# Altium PCB 4501-WB_AV_BMS.PcbDoc (part 1 of 2)
Units mm, origin at the board's own origin, x right, y up, seen from the top; angles counter-clockwise.
Board outline 95.46 x 71.36 mm, 2 copper layers (Top Layer, Bottom Layer), stack 1.671 mm thick; 104 components, 89 nets, 330 pads, 251 vias.
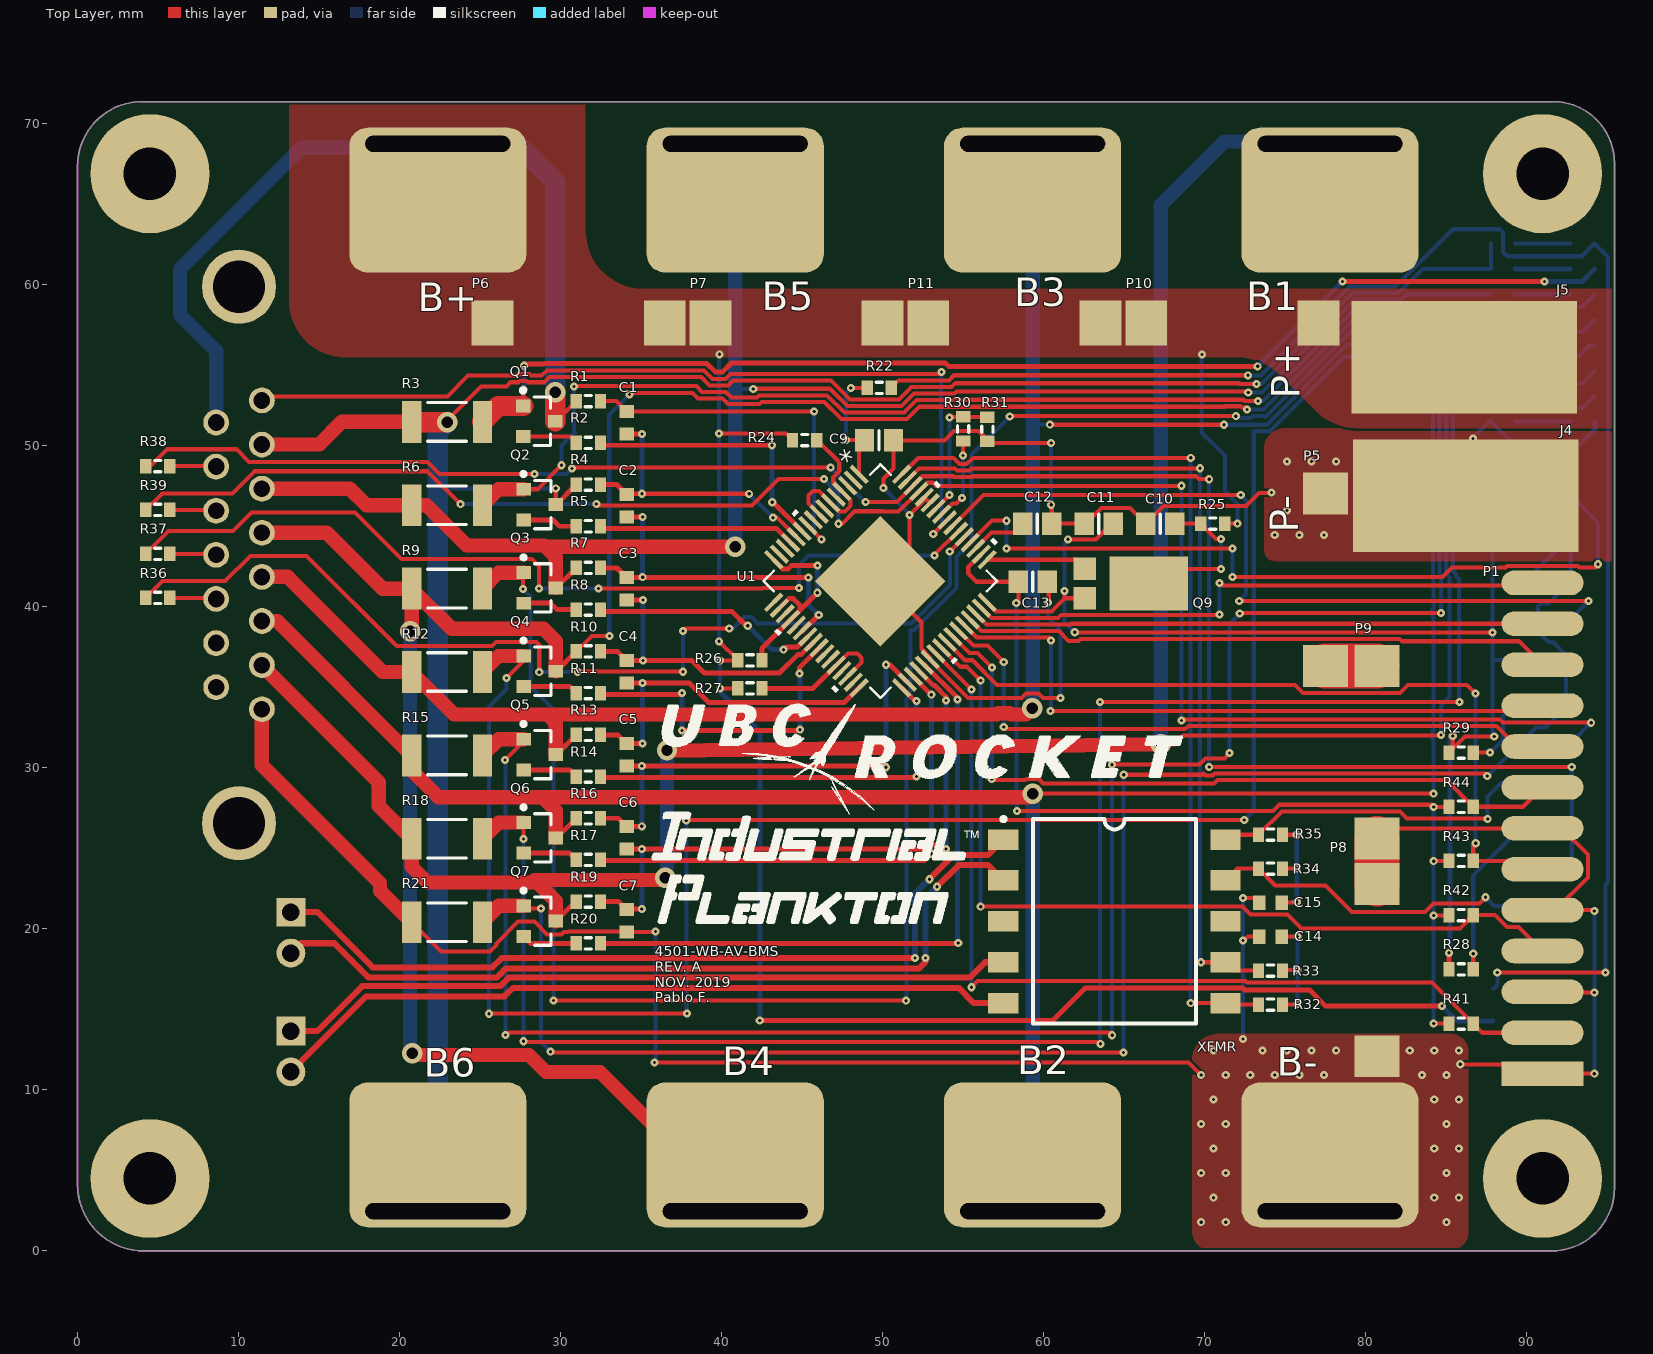
[diagram p0: Top Layer view]
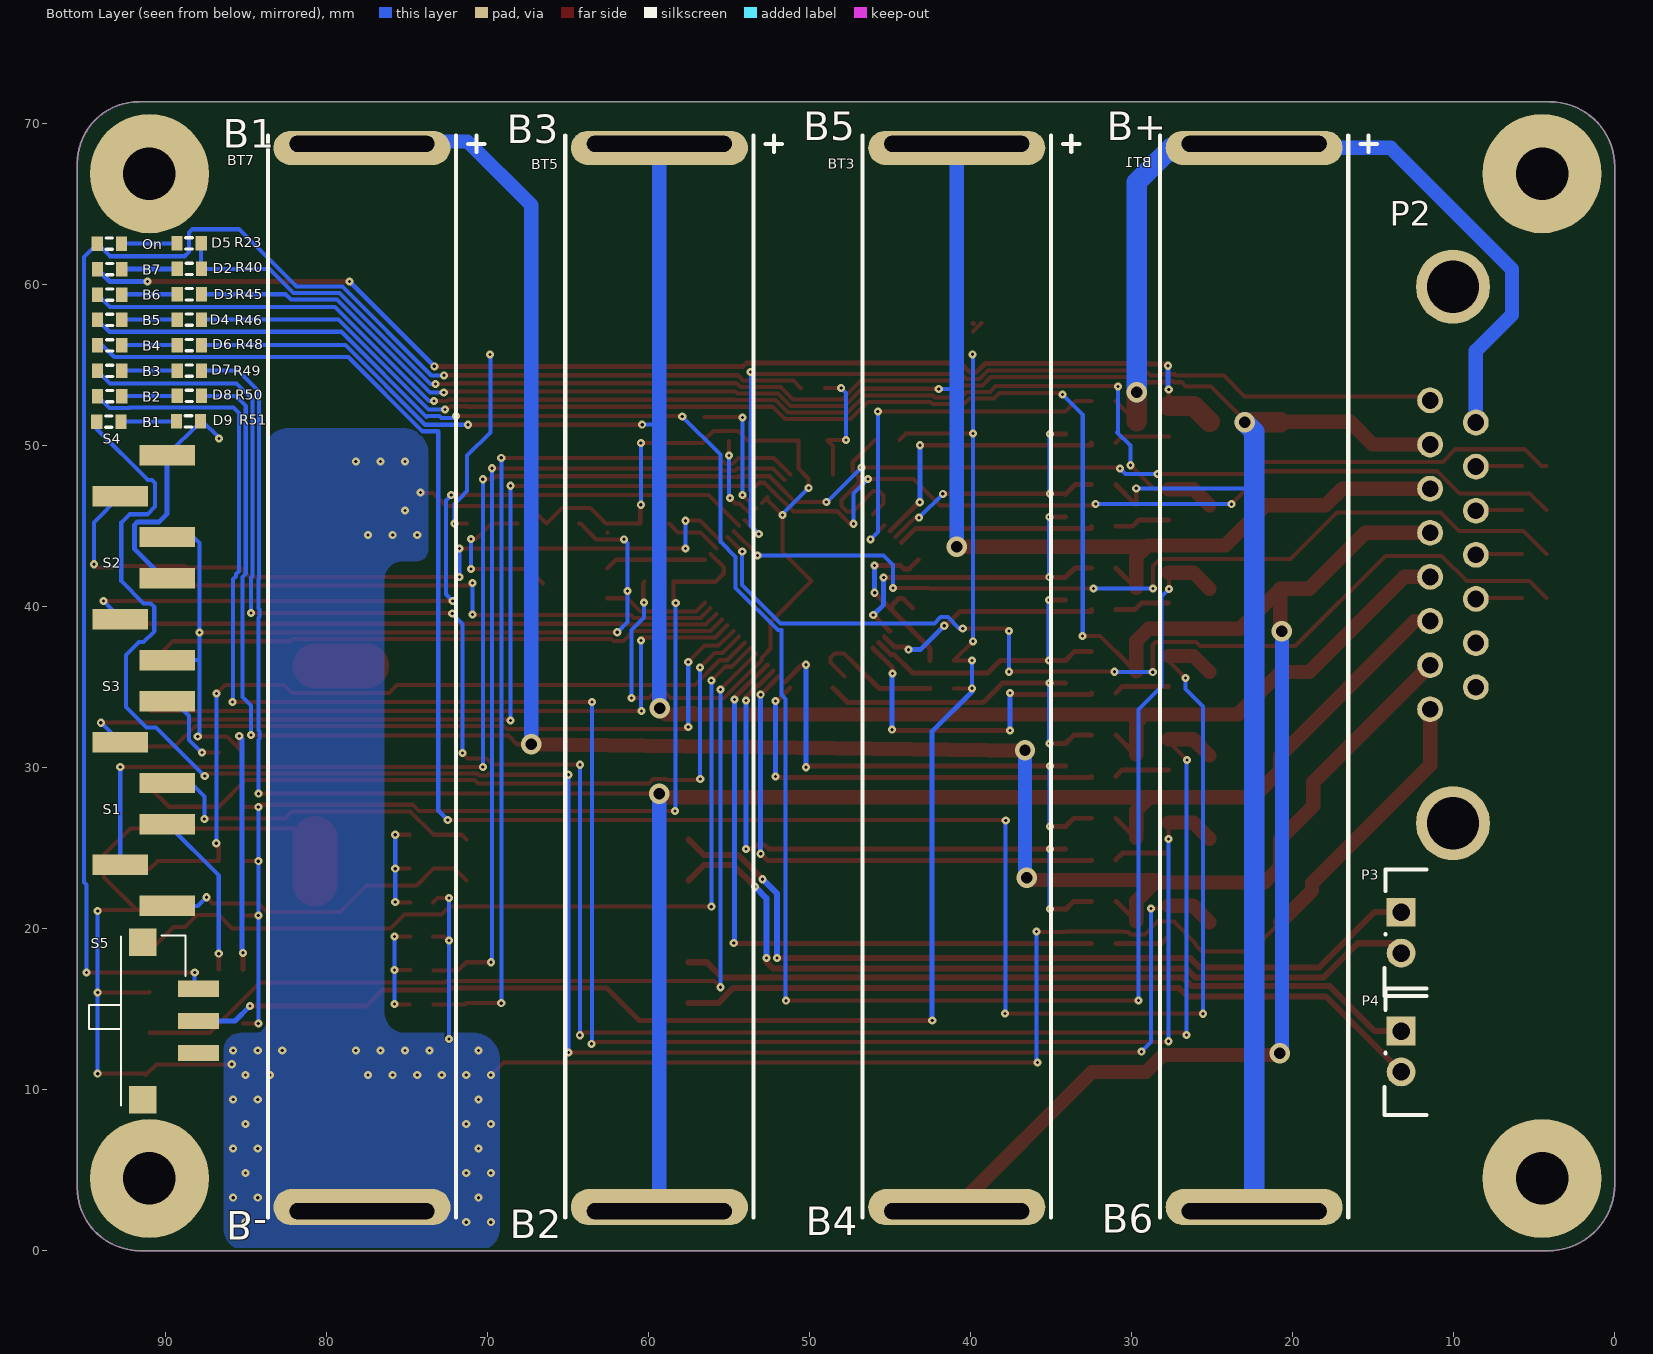
[diagram p1: Bottom Layer view, seen from below]

## Layer stack, top to bottom
Top Solder: solder mask 0.0102, Solder Resist, Dk 3.5
Top Layer: signal copper 0.0356
Dielectric 1: dielectric 1.6, FR-4, Dk 4.8
Bottom Layer: signal copper 0.0356
Bottom Solder: solder mask 0.0102, Solder Resist, Dk 3.5

## Board outline
4.115,0 91.567,0 ccw(c91.567,3.899) 95.466,3.899 95.466,67.554 ccw(c91.656,67.554) 91.656,71.364 4.011,71.364 ccw(c4.011,67.355) 0.001,67.355 0.001,4.113 ccw(c4.115,4.113)

## Design rules (kind name [scope] priority, off if disabled: settings)
Clearance [All] p1: gap=0.152 ignorepadtopadclearanceinfootprint=FALSE except(0: Arc-Hole Track-Hole SMDPad-Hole THPad-Hole Via-Hole Fill-Hole Poly-Hole Region-Hole Text-Hole)
ComponentClearance [All] p1: gap=0 collisioncheckmode=3 verticalgap=0.003 showdistances=FALSE
DiffPairsRouting [All] p1: maxlimit=0.254 minlimit=0.254 mostfreqgap=0.254 toplayer_minwidth=0.381 toplayer_maxwidth=0.381 toplayer_prefwidth=0.381 bottomlayer_minwidth=0.381 bottomlayer_maxwidth=0.381 bottomlayer_prefwidth=0.381 maxuncoupledlength=12.7
HoleSize [All] p1: absolutevalues=TRUE maxlimit=25.4 minlimit=0.025 maxpercent=80.000 minpercent=20.000
MinimumSolderMaskSliver [All] p1: minsoldermaskwidth=0.025
PolygonConnect [All] p1: connectstyle=Direct reliefconductorwidth=0.254 reliefentries=4 polygonreliefangle="90 Angle" airgapwidth=0.254
RoomDefinition BMS [InComponentClass('BMS')] p1: confinementstyle=ConfineIn formatcopy=TRUE lockcomponents=FALSE outline -5.828,1.356 96.572,1.356 96.572,69.854 -5.828,69.854
RoutingVias [All] p1: holewidth=0.2 width=0.505 viastyle="Through Hole" minholewidth=0.2 minwidth=0.505 maxholewidth=0.711 maxwidth=1.27
SilkToSilkClearance [All] p1: silktosilkclearance=0.025
SilkToSolderMaskClearance [IsPad] p1: minsilkscreentomaskgap=0.025 clearancetoexposedcopper=TRUE
SolderMaskExpansion [All] p1: expansion=0.102
Width [All] p1: maxlimit=5.08 minlimit=0.254 preferedwidth=0.305
24 further rules are at their usual default settings.

## Classes and differential pairs
differential pair IB: +IB_P -IB_N
differential pair IA: +IA_P -IA_N

## Components (designator, comment, footprint, x,y, rotation, side; value= is the part's Value field where it differs from the comment)
BT1 "Battery" PCBComponent_1#1 22.384,2.458 r90 bottom locked
BT3 "Battery" PCBComponent_1#1 40.855,2.458 r90 bottom locked
BT5 "Battery" PCBComponent_1#1 59.326,2.458 r90 bottom locked
BT7 "Battery" PCBComponent_1#1 77.796,2.458 r90 bottom locked
C1 "Cap Semi" 1608[0603] 34.102,51.432 r90 top value=10nF
C2 "Cap Semi" 1608[0603] 34.102,46.276 r90 top value=10nF
C3 "Cap Semi" 1608[0603] 34.102,41.12 r90 top value=10nF
C4 "Cap Semi" 1608[0603] 34.102,35.964 r90 top value=10nF
C5 "Cap Semi" 1608[0603] 34.102,30.808 r90 top value=10nF
C6 "Cap Semi" 1608[0603] 34.102,25.651 r90 top value=10nF
C7 "Cap Semi" 1608[0603] 34.102,20.495 r90 top value=10nF
C9 "Cap Semi" 6-0805_N 49.787,50.33 r180 top value=100nF
C10 "Cap Semi" 6-0805_N 67.244,45.161 r0 top value=100nF
C11 "Cap Semi" 6-0805_N 63.428,45.161 r0 top value=1uF
C12 "Cap Semi" 6-0805_N 59.611,45.161 r180 top value=1uF
C13 "Cap Semi" 6-0805_N 59.337,41.552 r180 top value=1uF
C14 "Cap Semi" 1608[0603] 74.096,19.514 r0 top value=10nF
C15 "Cap Semi" 1608[0603] 74.096,21.623 r0 top value=10nF
D2 "LED0" J1-0603 93.464,60.969 r180 bottom
D3 "LED0" J1-0603 93.464,59.39 r180 bottom
D4 "LED0" J1-0603 93.464,57.811 r180 bottom
D5 "LED0" J1-0603 93.482,62.547 r180 bottom
D6 "LED0" J1-0603 93.464,56.232 r180 bottom
D7 "LED0" J1-0603 93.464,54.654 r180 bottom
D8 "LED0" J1-0603 93.464,53.075 r180 bottom
D9 "LED0" J1-0603 93.518,51.496 r180 bottom
J4 "Socket" PCBComponent_1#2 86.213,46.886 r180 top
J5 "Socket" PCBComponent_1#2 86.119,55.499 r180 top
P1 "Header 13" PCBComponent_1#3 90.989,11 r90 top
P2 "5747845-4" *5747845-4 10.036,26.563 r270 bottom
P3 "Header 2" WM4900-ND 14.779,13.259 r180 bottom locked
P4 "Header 2" WM4900-ND 14.779,5.875 r180 bottom locked
P5 "Header 2" PCBComponent_1#4 77.526,36.33 r90 top
P6 "Header 2" PCBComponent_1#4 36.477,57.625 r180 top
P7 "Header 2" PCBComponent_1#4 50.011,57.625 r180 top
P8 "Header 2" PCBComponent_1#4 80.711,12.079 r90 top
P9 "Header 2" PCBComponent_1#4 80.714,25.617 r90 top
P10 "Header 2" PCBComponent_1#4 77.08,57.625 r180 top
P11 "Header 2" PCBComponent_1#4 63.546,57.625 r180 top
Q1 "MOSFET-P" SOT95P245X110-3N 28.677,51.519 r0 top
Q2 "MOSFET-P" SOT95P245X110-3N 28.705,46.344 r0 top
Q3 "MOSFET-P" SOT95P245X110-3N 28.705,41.17 r0 top
Q4 "MOSFET-P" SOT95P245X110-3N 28.705,35.996 r0 top
Q5 "MOSFET-P" SOT95P245X110-3N 28.705,30.821 r0 top
Q6 "MOSFET-P" SOT95P245X110-3N 28.705,25.647 r0 top
Q7 "MOSFET-P" SOT95P245X110-3N 28.705,20.472 r0 top
Q9 "DXT5551P5-13" DXT5551P5-13 66.543,41.448 r270 top
R1 "Res3" J1-0603 31.732,52.77 r0 top value=100
R2 "Res3" J1-0603 31.732,50.18 r0 top value=3.3k
R3 "Res3" 12Z-2010 22.955,51.482 r180 top value=33
R4 "Res3" J1-0603 31.732,47.589 r0 top value=100
R5 "Res3" J1-0603 31.732,44.999 r0 top value=3.3k
R6 "Res3" 12Z-2010 22.955,46.303 r180 top value=33
R7 "Res3" J1-0603 31.732,42.408 r0 top value=100
R8 "Res3" J1-0603 31.732,39.818 r0 top value=3.3k
R9 "Res3" 12Z-2010 22.955,41.124 r180 top value=33
R10 "Res3" J1-0603 31.732,37.227 r0 top value=100
R11 "Res3" J1-0603 31.732,34.637 r0 top value=3.3k
R12 "Res3" 12Z-2010 22.955,35.945 r180 top value=33
R13 "Res3" J1-0603 31.732,32.046 r0 top value=100
R14 "Res3" J1-0603 31.732,29.456 r0 top value=3.3k
R15 "Res3" 12Z-2010 22.955,30.766 r180 top value=33
R16 "Res3" J1-0603 31.732,26.865 r0 top value=100
R17 "Res3" J1-0603 31.732,24.275 r0 top value=3.3k
R18 "Res3" 12Z-2010 22.955,25.587 r180 top value=33
R19 "Res3" J1-0603 31.732,21.684 r0 top value=100
R20 "Res3" J1-0603 31.732,19.094 r0 top value=3.3k
R21 "Res3" 12Z-2010 22.955,20.408 r180 top value=33
R22 "1%" J1-0603 49.797,53.597 r0 top value=100
R23 "Res3" J1-0603 88.534,62.565 r180 bottom value=475
R24 "1%" J1-0603 45.164,50.35 r0 top value=100
R25 "1%" J1-0603 70.511,45.161 r0 top value=100
R26 "1%" J1-0603 41.767,36.665 r0 top value=100
R27 "1%" J1-0603 41.767,34.933 r0 top value=100
R28 "Res3" J1-0603 85.938,17.481 r180 top value=1M
R29 "Res3" J1-0603 85.938,30.945 r180 top value=1M
R30 "Res3" J1-0603 55.009,51.044 r90 top value=1k
R31 "Res3" J1-0603 56.511,51.023 r270 top value=1k
R32 "Res3" J1-0603 74.096,15.295 r0 top value=50
R33 "Res3" J1-0603 74.096,17.404 r180 top value=50
R34 "Res3" J1-0603 74.096,23.732 r0 top value=50
R35 "Res3" J1-0603 74.096,25.841 r180 top value=50
R36 "Res3" J1-0603 4.989,40.551 r180 top value=100
R37 "Res3" J1-0603 4.989,43.281 r180 top value=100
R38 "Res3" J1-0603 4.989,48.74 r0 top value=100
R39 "Res3" J1-0603 4.989,46.01 r0 top value=100
R40 "Res3" J1-0603 88.516,60.986 r0 bottom value=475
R41 "Res3" J1-0603 85.938,14.115 r0 top value=10k
R42 "Res3" J1-0603 85.938,20.847 r0 top value=10k
R43 "Res3" J1-0603 85.938,24.213 r0 top value=10k
R44 "Res3" J1-0603 85.938,27.579 r0 top value=10k
R45 "Res3" J1-0603 88.516,59.408 r0 bottom value=475
R46 "Res3" J1-0603 88.516,57.829 r0 bottom value=475
R48 "Res3" J1-0603 88.516,56.25 r0 bottom value=475
R49 "Res3" J1-0603 88.516,54.671 r0 bottom value=475
R50 "Res3" J1-0603 88.516,53.093 r0 bottom value=475
R51 "Res3" J1-0603 88.57,51.514 r0 bottom value=475
S1 "SW-SPDT" *TSM-103-01-L-SV 91.348,23.965 r270 bottom
S2 "SW-SPDT" *TSM-103-01-L-SV 91.352,39.23 r270 bottom
S3 "SW-SPDT" *TSM-103-01-L-SV 91.348,31.593 r270 bottom
S4 "SW-SPDT" *TSM-103-01-L-SV 91.352,46.871 r270 bottom
S5 "SS312SAH4-R" *SW_SS312SAH4-R 89.46,14.273 r180 bottom
U1 "LTC6812HLWE-1" "LQFP64_LWE_A - duplicate" 49.868,41.592 r315 top value=Value
XFMR "HM2100NLT" HM2100NLT 57.513,25.54 r0 top

## Footprints (in the part's own frame and the unit in brackets; to place one, negate y for a bottom-side part, rotate by r counter-clockwise, add the part's x,y. Pads: shape width x height; smd on the part's side, far side on the other; paste and mask are expansions set on the pad)
6-0805_N [mm] "Chip Resistor, Body 2.0x1.2mm, IPC Medium Density"
  rect 1.2x1.4 smd: 1(-0.9,0) 2(0.9,0)
  silkscreen extent 0,-0.6 0,0.6, body extent -1.07,-0.7 1.07,0.7, height 0.7
12Z-2010 [mm] "Chip Resistor, Body 5.0x2.5mm, IPC High Density"
  rect 1.2x2.6 smd: 1(-2.2,0) 2(2.2,0)
  silkscreen extent -1.2,-1.2 1.2,1.2, body extent -2.58,-1.33 2.58,1.33, height 0.9
1608[0603] [mm] "Chip Capacitor, Body 1.6x0.8mm, IPC High Density"
  rect 0.8x0.9 smd: 1(-0.7,0) 2(0.7,0)
  body extent -0.87,-0.48 0.87,0.48, height 1.3
*5747845-4 [mm]
  round 1.6 hole 1.04: 1(-26.25,-1.42) 2(-23.51,-1.42) 3(-20.77,-1.42) 4(-18.03,-1.42) 5(-15.29,-1.42) 6(-12.55,-1.42) 7(-9.81,-1.42) 8(-7.07,-1.42) 9(-24.88,1.42) 10(-22.14,1.42) 11(-19.4,1.42) 12(-16.66,1.42) 13(-13.92,1.42) 14(-11.18,1.42) 15(-8.44,1.42)
  round 4.6 hole 3.25: 16(0,0) 17(-33.32,0)
  body extent -36.3,-3.03 3.07,15.86, height 12.62
*SW_SS312SAH4-R [mm]
  rect 2.55x1 smd: 1(1.525,-2) 2(1.525,0) 3(1.525,2)
  rect 1.7x1.7 smd: P$1(-1.95,-4.9) P$2(-1.95,4.9)
  silkscreen extent -5.3,-5.25 0.7,5.3, body extent -5.27,-5.25 2.12,5.25, height 3.1
*TSM-103-01-L-SV [mm]
  rect 1.27x3.43 smd: 1(-2.54,1.46) 2(0,-1.46) 3(2.54,1.46)
  body extent -3.94,-2.64 3.68,2.64, height 9.78
DXT5551P5-13 [mm]
  rect 1.4x1.39 smd: 1(0.92,-3.982) 2(-0.92,-3.982)
  rect 3.36x4.86 smd: 3(0,0)
HM2100NLT [mm]
  rect 1.89x1.27 smd: 1(0,0) 2(0,-2.54) 3(0,-5.08) 4(0,-7.62) 5(0,-10.16) 6(13.79,-10.16) 7(13.79,-7.62) 8(13.79,-5.08) 9(13.79,-2.54) 10(13.79,0)
  silkscreen extent -0.13,-11.43 11.96,1.4, body extent -0.5,-12.3 14.47,2.4, height 3.3
J1-0603 [mm] "Chip Resistor, Body 1.6x0.8mm, IPC High Density"
  rect 0.7x0.9 smd: 1(-0.75,0) 2(0.75,0)
  silkscreen extent -0.2,-0.35 0.2,0.35, body extent -0.85,-0.48 0.85,0.48, height 0.9
"LQFP64_LWE_A - duplicate" [mm]
  rect 1.461x0.27 smd paste+0 mask+0: 1(-5.625,3.75) 2(-5.625,3.25) 3(-5.625,2.75) 4(-5.625,2.25) 5(-5.625,1.75) 6(-5.625,1.25) 7(-5.625,0.75) 8(-5.625,0.25) 9(-5.625,-0.25) 10(-5.625,-0.75) 11(-5.625,-1.25) 12(-5.625,-1.75) 13(-5.625,-2.25) 14(-5.625,-2.75) 15(-5.625,-3.25) 16(-5.625,-3.75) 33(5.625,-3.75) 34(5.625,-3.25) 35(5.625,-2.75) 36(5.625,-2.25) 37(5.625,-1.75) 38(5.625,-1.25) 39(5.625,-0.75) 40(5.625,-0.25) 41(5.625,0.25) 42(5.625,0.75) 43(5.625,1.25) 44(5.625,1.75) 45(5.625,2.25) 46(5.625,2.75) 47(5.625,3.25) 48(5.625,3.75)
  rect 0.27x1.461 smd paste+0 mask+0: 17(-3.75,-5.625) 18(-3.25,-5.625) 19(-2.75,-5.625) 20(-2.25,-5.625) 21(-1.75,-5.625) 22(-1.25,-5.625) 23(-0.75,-5.625) 24(-0.25,-5.625) 25(0.25,-5.625) 26(0.75,-5.625) 27(1.25,-5.625) 28(1.75,-5.625) 29(2.25,-5.625) 30(2.75,-5.625) 31(3.25,-5.625) 32(3.75,-5.625) 49(3.75,5.625) 50(3.25,5.625) 51(2.75,5.625) 52(2.25,5.625) 53(1.75,5.625) 54(1.25,5.625) 55(0.75,5.625) 56(0.25,5.625) 57(-0.25,5.625) 58(-0.75,5.625) 59(-1.25,5.625) 60(-1.75,5.625) 61(-2.25,5.625) 62(-2.75,5.625) 63(-3.25,5.625) 64(-3.75,5.625)
  rect 5.74x5.74 smd paste-2.857 mask+0: 65(0,0)
  silkscreen extent -6.86,-6.86 6.86,6.86, body extent 0,0 0.25,0.25, height 0.25
PCBComponent_1#1 [mm]
  rrect100% 2.125x11 / inner rrect25% 0x0 / far side rrect0% 0x0 all layers, no hole: 1(66.04,0)
  rrect0% 0x0 / inner rrect0% 0x0 / far side rrect25% 9x11 hole 9 slot 1 at 0 deg copper offset -3.5,0: 1(66.294,0)
  rrect25% 0x0 / inner rrect25% 0x0 / far side rrect25% 9x11 hole 9 slot 1 at 0 deg copper offset 3.5,0: 2(0,0)
  rrect100% 2.25x11 / inner rrect25% 0x0 / far side rrect0% 0x0 all layers, no hole: 2(0.254,0)
  silkscreen extent -0.38,-7.62 66.8,5.84, body extent 0.63,-9.2 65.63,9.2, height 18.6
PCBComponent_1#2 [mm]
  rect 14x7 smd: 1(0,0)
PCBComponent_1#3 [mm]
  rect 1.524x5.08 smd: 1(0,0)
  oval 1.524x5.08 smd: 2(2.54,0) 3(5.08,0) 4(7.62,0) 5(10.16,0) 6(12.7,0) 7(15.24,0) 8(17.78,0) 9(20.32,0) 10(22.86,0) 11(25.4,0) 12(27.94,0) 13(30.48,0)
PCBComponent_1#4 [mm]
  rect 2.6x2.8 smd: 1(0,0) 2(10.7,0)
  body extent -0.94,-1.15 11.36,1.15, height 1.8
SOT95P245X110-3N [mm] "SOT23, 3-Leads, Body 2.90x2.45mm, Pitch 0.95mm, IPC Medium Density"
  rect 0.9x0.8 smd: 1(-1,0.95) 2(-1,-0.95) 3(1,0)
  silkscreen extent -1.12,-1.5 0.7,2.02, body extent -0.7,-1.5 0.7,1.5, height 1.1
WM4900-ND [mm]
  rect 1.79x1.79 hole 1.09: 1(1.524,7.772)
  round 1.79 hole 1.09: 2(1.524,5.232)
  silkscreen extent 0.48,2.57 3.1,10.42, body extent 0.89,2.84 14.48,10.21, height 7.11

## Part data
BT1 BT3 BT5 BT7: "Multicell Battery", LatestRevisionDate=17-Jul-2002, LatestRevisionNote="Re-released for DXP Platform.", PackageDescription="Battery; 2 Leads", PackageReference=BAT-2, Published=24-Mar-1999, Publisher="Altium Limited"
C1 C2 C3 C4 C5 C6 C7 C9 C10 C11 C12 C13 C14 C15: "Capacitor (Semiconductor SIM Model)", LatestRevisionDate=29-May-2009, LatestRevisionNote="IPC-7351 Footprint Added.", PackageDescription="Chip Capacitor", PackageReference=C1206, Published=8-Jun-2000, Publisher="Altium Limited"
  C1 C2 C3 C4 C5 C6 C7 C14 C15: SPN=399-1092-1-ND
  C9 C10: SPN=1276-1090-1-ND
  C11 C12 C13: SPN=311-3498-1-ND
D2 D3 D4 D5 D6 D7 D8 D9: "Typical INFRARED GaAs LED", LatestRevisionDate=08-Jul-2005, LatestRevisionNote="Mech Layer 1 removed.", PackageDescription="LED; 2 Leads", PackageReference=LED-0, Published=8-Jun-2000, Publisher="Altium Limited"
  D2 D3 D4 D6 D7 D8 D9: SPN=160-1435-1-ND
  D5: SPN=160-1646-1-ND
P1: "Header, 13-Pin", LatestRevisionDate=17-Jul-2002, LatestRevisionNote="Re-released for DXP Platform.", Publisher="Altium Limited"
P2: library part "Header 7X2A", "Header, 7-Pin, Dual row", LatestRevisionDate=17-Jul-2002, LatestRevisionNote="Re-released for DXP Platform.", Publisher="Altium Limited"
P3 P4 P5 P6 P7 P8 P9 P10 P11: "Header, 2-Pin", LatestRevisionDate=17-Jul-2002, LatestRevisionNote="Re-released for DXP Platform.", Publisher="Altium Limited"
  P5 P6 P7 P8 P9 P10 P11: SPN=36-5104-ND
Q1 Q2 Q3 Q4 Q5 Q6 Q7: "P-Channel MOSFET", LatestRevisionDate=17-Jul-2002, LatestRevisionNote="Re-released for DXP Platform.", PackageDescription="TO, Flat Index; 3 In-Line, Axial Leads; Body Dia. 4.6mm; Lead Dia. 0.5 mm (max)", PackageReference=E3, PackageVersion=1995/1996, Published=8-Jun-2000, Publisher="Altium Limited", SPN=BSS308PEH6327XTSA1CT-ND
Q9: library part 2N3904, "NPN General Purpose Amplifier", ComponentLink1Description="Manufacturer Link", ComponentLink1URL=http://www.fairchildsemi.com/, ComponentLink2Description=Datasheet, ComponentLink2URL=http://www.fairchildsemi.com/ds/2N%2F2N3904.pdf, DatasheetVersion=1997, LatestRevisionDate=15-Jan-2003, LatestRevisionNote="PCB Footprint 'BCY-W3/D4.7' replaced", PackageDescription="TO, Flat Index; 3 In-Line, Axial Leads; Body Dia. 4.5mm; Leads 0.51 x 0.48 mm (max)", PackageReference=TO-92A, PackageVersion=Sep-1998, Published=8-Jun-2000, Publisher="Altium Limited", SPN=DXT5551P5-13CT-ND
R1 R2 R3 R4 R5 R6 R7 R8 R9 R10 R11 R12 R13 R14 R15 R16 R17 R18 R19 R20 R21 R23 R28 R29 R30 R31 R32 R33 R34 R35 R36 R37 R38 R39 R40 R41 R42 R43 R44 R45 R46 R48 R49 R50 R51: "Resistor", LatestRevisionDate=29-May-2009, LatestRevisionNote="IPC-7351 Footprint Added.", PackageDescription="Chip Resistor", PackageReference=J1-0603, Published=8-Jun-2000, Publisher="Altium Limited"
  R1 R4 R7 R10 R13 R16 R19 R36 R37 R38 R39: Parameter 1=A129676CT-ND, SPN=A129676CT-ND
  R2 R5 R8 R11 R14 R17 R20: SPN=A129543CT-ND
  R3 R6 R9 R12 R15 R18 R21: SPN=A130642CT-ND
  R23 R40 R45 R46 R48 R49 R50 R51: SPN=RMCF2010JT33R0CT-ND
  R28 R29: SPN=A129724CT-ND
  R30 R31: SPN=RNCP0603FTD1K00CT-ND
  R32 R33 R34 R35: SPN=311-2598-1-ND
R22 R24 R25 R26 R27: library part Res3, "Resistor", LatestRevisionDate=29-May-2009, LatestRevisionNote="IPC-7351 Footprint Added.", PackageDescription="Chip Resistor", PackageReference=J1-0603, Published=8-Jun-2000, Publisher="Altium Limited", SPN=A129676CT-ND
  R22 R24 R25 R27: Parameter 1=A129676CT-ND
S1 S2 S3 S4: "SPDT Subminiature Toggle Switch, Right Angle Mounting, Vertical Actuation", ComponentLink1Description="Manufacturer Link", ComponentLink1URL=http://www.apem.com, DatasheetVersion=05-Dec-2000, LatestRevisionDate=17-Dec-2003, LatestRevisionNote="Schematic revised, PCB Footprint replaced.", PackageDescription="Switch; 4 Leads", PackageReference=TL36WW15050, Published=24-Mar-1999, Publisher="Altium Limited", SPN="S9337-ND, SAM8981-ND"
S5: "Switch Slide ON None ON SPDT Side Slide 0.1A 28VAC 28VDC 0.4VA 10000Cycles Gull Wing SMD T/R", Package=None, Availability=Unavailable, MF="NKK Switches", MP=SS312SAH4-R, Price=None, SnapEDA_Link=https://www.snapeda.com/parts/SS312SAH4-R/NKK%20Switches/view-part/?ref=snap
U1: "No Description Available", Copyright="Copyright (C) 2018 Accelerated Designs. All rights reserved", RefDes=RefDes, Type=DEV
XFMR: library part "Header 5X2A", "Header, 5-Pin, Dual row", LatestRevisionDate=17-Jul-2002, LatestRevisionNote="Re-released for DXP Platform.", Publisher="Altium Limited", SPN=1840-1032-1-ND
J4 J5: LatestRevisionDate=17-Jul-2002, LatestRevisionNote="Re-released for DXP Platform.", Publisher="Altium Limited"

## Free pads (board coordinates)
  round 7.4 hole 3.251: 1(4.501,4.5) 1(4.501,66.896) 1(90.996,4.5) 1(90.996,66.896)

## Via types
v1: diameter 0.505, hole 0.2, Top Layer to Bottom Layer, tented both sides, 238 vias
v2: diameter 1.27, hole 0.711, Top Layer to Bottom Layer, tented both sides, 10 vias
v3: diameter 0.505, hole 0.2, Top Layer to Bottom Layer, 3 vias

## Nets (pads, with @x,y where several pads share a name; then routed paths per layer and width w, separated by ;. In a path a pad name is that pad's centre, name@x,y a point inside that pad or via, vN(x,y) a via of type N, cw(c..) or ccw(c..) an arc to the next point about the centre after c; other vN are vias at no path point)
C1: C6.1 C7.2 R19.2 U1.36 | length 38.4
  Top Layer w0.305: R19.2 33.613,21.684 C7.2 34.128,21.221 v1(35.053,21.221) ; C6.1 v1(35.053,24.951) 52.535,24.951 52.802,25.218 53.263,25.218 53.53,24.951 v1(53.938,24.951) ; U1.36 53.182,35.096 53.263,35.096 53.938,34.422 v1(53.938,34.175)
  Bottom Layer w0.305: v1(35.053,21.221) v1(35.053,24.951) ; v1(53.938,24.951) v1(53.938,34.175)
C2: C5.1 C6.2 R16.2 U1.34 | length 30.9
  Top Layer w0.305: R16.2 33.588,26.865 C6.2 35.044,26.351 v1(35.054,26.361) ; C5.1 v1(35.054,30.108) 50.208,30.108 50.218,30.097 v1(50.218,30.03) ; v1(50.218,36.398) 50.466,36.398 U1.34
  Bottom Layer w0.305: v1(35.054,26.361) v1(35.054,30.108) ; v1(50.218,30.03) v1(50.218,36.398)
C3: C4.1 C5.2 R13.2 U1.32 | length 21.9
  Top Layer w0.305: R13.2 33.563,32.046 C5.2 v1(35.087,31.508) ; C4.1 35.082,35.264 v1(35.087,35.259) ; v1@35.087,35.264 38.002,35.264 39.213,34.054 47.632,34.054 U1.32
  Bottom Layer w0.305: v1(35.087,31.508) v1(35.087,35.259)
C6: C3.1 C4.2 R10.2 U1.24 | length 19.4
  Top Layer w0.305: R10.2 33.539,37.227 C4.2 v1@35.127,36.664 ; C3.1 v1(35.132,40.42) ; v1@35.11,36.647 v1@35.127,36.664 ; v1(35.132,36.668) v1@35.127,36.664 ; U1.24 44.965,37.043 44.76,37.043 43.599,35.883 38.939,35.883 38.157,36.664 v1@35.127,36.664
  Bottom Layer w0.305: v1(35.132,36.668) v1(35.132,40.42)
C7: C2.1 C3.2 R7.2 U1.22 | length 22
  Top Layer w0.305: R7.2 33.514,42.408 C3.2 v1@35.122,41.82 ; C2.1 v1(35.104,45.576) ; v1(35.104,41.837) v1@35.122,41.82 ; v1@35.128,41.813 v1@35.122,41.82 ; U1.22 45.055,38.499 v1(46.04,39.484) ; v1(45.395,41.821) v1(45.395,41.821) v1@35.122,41.82
  Bottom Layer w0.305: v1(35.104,41.837) v1(35.104,45.576) ; v1(45.395,41.821) 45.395,40.129 v1(46.04,39.484)
C11: C1.1 C2.2 R4.2 U1.12 | length 18.2
  Top Layer w0.254: v1(35.057,47.015) 41.717,47.015 v1(41.719,47.013) ; v1(43.2,45.532) 43.453,45.532 U1.12
  Top Layer w0.305: R4.2 33.489,47.589 C2.2 34.141,47.015 v1(35.057,47.015) ; C1.1 35.056,50.732 v1(35.057,50.731)
  Bottom Layer w0.254: v1(41.719,47.013) v1(43.2,45.532)
  Bottom Layer w0.305: v1(35.057,47.015) v1(35.057,50.731)
C12: C1.2 R1.2 U1.10 | length 22.9
  Top Layer w0.254: R1.2 33.464,52.77 C1.2 v1(45.757,52.132) ; U1.10 45.364,45.04 v1(46.218,44.186)
  Bottom Layer w0.254: v1(45.757,52.132) 45.757,44.647 v1(46.218,44.186)
Cell1: BT7.1 P2.7 Q7.3 R18.2 R19.1 R50.1 | length 163.4
  Top Layer w0.254: v2(67.273,31.458) 68.166,31.458 68.704,31.995 84.645,31.995 v1(84.679,32.029)
  Top Layer w0.305: Q7.3 30.917,21.684 R19.1
  Top Layer w0.889: P2.7 18.722,29.107 18.722,27.62 R18.2 20.755,23.872 21.748,22.879 28.553,22.879 ; Q7.3 29.705,21.728 28.553,22.879 ; v2(36.51,23.183) 36.352,23.025 28.407,23.025 28.553,22.879 ; v2(36.617,31.074) 36.634,31.057 v2(67.273,31.458)
  Bottom Layer w0.254: v1(84.679,32.029) 84.679,33.853 85.215,34.39 85.215,41.856 85.011,42.06 85.011,52.464 85.64,53.093 R50.1
  Bottom Layer w0.889: v2(36.51,23.183) 36.617,23.289 v2(36.617,31.074) ; v2(67.273,31.458) 67.273,64.936 71.236,68.899 77.395,68.899 BT7.1@77.796,68.498
Cell2: BT5.2 P2.6 Q6.3 R15.2 R16.1 R49.1 | length 137.5
  Top Layer w0.254: v2(59.326,28.391) v1(84.22,28.391)
  Top Layer w0.305: Q6.3 29.764,25.647 R16.1
  Top Layer w0.889: P2.6 12.408,39.113 R15.2 20.755,29.841 22.431,28.166 28.877,28.166 ; Q6.3 29.705,27.339 28.877,28.166 ; v2(59.326,28.391) 59.101,28.166 28.877,28.166
  Bottom Layer w0.254: v1(84.22,28.391) 84.22,31.736 84.147,31.809 84.147,32.25 84.22,32.323 84.22,39.315 84.152,39.383 84.152,39.824 84.22,39.892 84.22,41.701 84.198,41.723 84.198,53.066 84.22,53.088 84.22,53.402 85.489,54.671 R49.1
  Bottom Layer w0.889: BT5.2@59.326,2.712 v2(59.326,28.391)
Cell3: BT5.1 P2.5 Q5.3 R12.2 R13.1 R48.1 | length 121.4
  Top Layer w0.254: v1(60.394,51.308) 60.398,51.304 v1(71.212,51.304)
  Top Layer w0.305: Q5.3 29.757,30.821 R13.1
  Top Layer w0.889: P2.5 13.059,41.853 18.967,35.945 R12.2 23.396,33.304 29.2,33.304 29.201,33.303 ; Q5.3 29.705,32.8 29.201,33.303 ; v2(59.301,33.703) 58.901,33.303 57.959,33.303 57.885,33.377 57.182,33.377 57.108,33.303 29.201,33.303
  Bottom Layer w0.254: 59.326,51.321 59.338,51.308 v1(60.394,51.308) ; v1(71.212,51.304) 73.873,51.304 78.82,56.25 R48.1
  Bottom Layer w0.889: v2(59.301,33.703) 59.326,33.727 59.326,51.321 BT5.1@59.326,68.498
Cell4: BT3.2 P2.4 Q4.3 R9.2 R10.1 R46.1 | length 152.8
  Top Layer w0.254: R10.1 31.946,38.191 v1(33.043,38.191) ; v1(34.28,53.175) 34.28,53.279 38.202,53.279 38.543,52.938 40.067,52.938 40.42,52.585 42.362,52.585 42.503,52.725 46.382,52.725 47.46,51.648 51.517,51.648 52.293,52.423 71.236,52.423 71.265,52.452 72.248,52.452 72.331,52.369 72.599,52.369 72.647,52.321 v1(72.647,52.243)
  Top Layer w0.305: Q4.3 29.75,35.996 R10.1
  Top Layer w0.889: P2.4 15.49,44.593 18.959,41.124 R9.2 ; v2(20.659,38.478) 20.755,38.575 R9.2 ; v2(20.782,12.271) 20.889,12.164 28.048,12.164 29.102,11.11 32.457,11.11 BT3.2@40.855,2.712 ; Q4.3 29.705,37.877 28.948,38.633 23.246,38.633 R9.2
  Bottom Layer w0.254: v1(33.043,38.191) 33.028,38.207 33.028,51.923 v1(34.28,53.175) ; v1(72.647,52.243) 72.647,52.242 73.662,52.242 79.249,57.829 R46.1
  Bottom Layer w0.889: v2@20.659,38.519 v2(20.659,38.478) 20.659,12.394 v2(20.782,12.271)
Cell5: BT3.1 P2.3 Q3.3 R6.2 R7.1 R45.1 | length 110.6
  Top Layer w0.254: v1(41.974,53.523) 41.958,53.538 46.748,53.538 47.825,52.461 51.181,52.461 51.956,53.236 54.459,53.236 54.595,53.371 72.656,53.371 v1(72.72,53.308)
  Top Layer w0.305: Q3.3 29.744,41.17 R7.1
  Top Layer w0.889: P2.3 16.919,47.333 17.948,46.303 R6.2 21.682,46.303 24.183,43.802 28.981,43.802 ; 28.999,43.797 29.061,43.735 ; Q3.3 29.705,43.092 29.061,43.735 ; v2@40.855,43.707 v2(40.855,43.735) 29.061,43.735
  Bottom Layer w0.254: 40.855,53.586 40.918,53.523 v1(41.974,53.523) ; v1(72.72,53.308) 73.578,53.308 79.351,59.08 82.206,59.08 82.533,59.408 R45.1
  Bottom Layer w0.889: v2(40.855,43.735) 40.855,53.586 BT3.1@40.855,68.498
Cell6: BT1.2 P2.2 Q2.3 R3.2 R4.1 R23.2 R40.1 | length 143.3
  Top Layer w0.254: v2(22.979,51.465) 22.979,51.602 25.063,53.685 26.64,53.685 26.899,53.945 27.378,53.945 27.466,54.032 27.906,54.032 27.994,53.945 29.003,53.945 29.331,54.272 38.743,54.272 39.264,53.751 40.42,53.751 40.725,54.055 46.806,54.055 47.993,52.867 51.012,52.867 51.788,53.642 54.291,53.642 54.531,53.882 72.143,53.882 72.185,53.839 v1(73.236,53.839) ; Q2.3 v1(29.705,47.354) v1@29.705,47.37
  Top Layer w0.305: Q2.3 29.737,46.344 R4.1
  Top Layer w0.889: P2.2 15.014,50.073 16.423,51.482 R3.2
  Top Layer w1.27: R3.2@20.772,51.465 v2(22.979,51.465)
  Bottom Layer w0.254: 22.384,47.374 22.403,47.354 v1(29.705,47.354) ; v2@22.903,51.542 v2(22.979,51.465) ; v1(73.236,53.839) 73.536,53.839 79.183,59.487 82.038,59.487 83.537,60.986 R40.1 87.784,61.004 R23.2
  Bottom Layer w1.27: BT1.2@22.384,2.712 22.384,47.374 22.384,50.87 v2(22.979,51.465)
CS: R39.1 S3.2 U1.61 | length 112.1
  Top Layer w0.254: R39.1 5.271,47.043 9.638,47.043 11.008,48.413 21.742,48.413 v1(23.785,46.37) ; v1(32.228,46.378) 32.309,46.297 41.898,46.297 43.533,47.932 v1(46.365,47.932) ; v1(47.274,45.151) 47.475,45.151 48.254,45.931 49.984,45.931 50.001,45.913 51.006,45.913 U1.61 52.792,47.699 53.145,47.699 53.333,47.511 v1(68.577,47.511) ; v1(68.577,32.934) 68.652,33.008 88.316,33.008 88.525,32.799 v1(94.015,32.799)
  Bottom Layer w0.254: v1(23.785,46.37) 32.22,46.37 v1(32.228,46.378) ; v1(46.365,47.932) 47.274,47.023 v1(47.274,45.151) ; v1(68.577,32.934) v1(68.577,47.511) ; S3.2 v1(94.015,32.799)
DRIVE: Q9.2 U1.49 | length 6.3
  Top Layer w0.254: U1.49 62.01,42.918 Q9.2
GND: BT7.2 C7.1 C9.1 C10.1 C11.1 C12.1 C13.1 C14.1 C15.1 J4.1 P1.1 P1.3 P1.5 P1.7 P2.8 P5.2 P8.1 P8.2 P9.1 R21.2 R31.2 R51.1 S2.1 S4.1 U1.38 U1.59 U1.60 U1.65 | length 214.8
  Top Layer w0.254: R21.2 22.583,18.58 25.622,18.58 26.035,18.992 26.035,19.098 27.376,20.439 28.382,20.439 29.167,19.655 30.066,19.655 30.204,19.793 30.486,19.793 30.516,19.823 34.102,19.823 C7.1 35.876,19.795 v1(35.908,19.827) ; v1(35.837,11.702) 69.012,11.702 v1(69.793,10.921) ; v1(50.053,47.376) 50.053,47.95 50.687,48.583 C9.1 53.85,50.33 54.443,50.923 55.97,50.923 56.511,50.382 R31.2 56.619,50.165 v1(60.475,50.165) ; U1.59 U1.60 52.608,46.631 v1(51.676,45.7) 51.676,43.401 U1.65 52.423,39.037 52.423,37.39 52.961,36.852 U1.38 52.961,36.68 55.307,34.335 58.64,34.335 58.923,34.618 59.68,34.618 59.963,34.335 61.055,34.335 v1(61.058,34.338) ; C13.1 60.328,41.461 60.328,40.302 v1(60.282,40.256) ; v1(60.475,46.332) 60.511,46.296 C12.1 C11.1 62.633,45.161 63.612,46.141 65.365,46.141 C10.1 67.452,46.269 72.575,46.269 73.381,47.074 74.141,47.074 v3(74.156,47.089) ; v1(72.398,19.268) 72.466,19.268 72.711,19.514 C14.1 ; v1(72.398,21.907) 73.111,21.907 C15.1 ; P8.2 P8.2@80.714,22.781 ; P9.1 81.337,26.24 P1.7 92.167,26.24 93.809,24.599 93.809,23.186 P1.5@91.783,21.16 ; v3(85.88,11.582) 90.568,11.582 91.229,10.921 91.308,11 v1(94.209,11) ; P1.3 91.02,16.05 v1(94.209,16.05) ; P1.5@91.244,21.16 P1.5@91.783,21.16 ; v1(94.209,21.097) 94.146,21.16 P1.5@91.783,21.16
  Top Layer w0.889: P2.8 11.456,30.167 18.796,22.827 18.796,22.367 R21.2
  Top Layer w2.794: P8.2@80.714,22.781 P9.1
  Bottom Layer w0.254: v1(35.837,11.702) 35.908,11.773 v1(35.908,19.827) ; v1(50.053,47.376) 51.676,45.753 v1(51.676,45.7) ; v1(60.282,40.256) 60.282,39.322 61.059,38.545 v1(61.058,34.338) ; v1(60.475,46.332) v1(60.475,50.165) ; v3(72.398,13.147) v1(72.398,19.268) ; v1@72.398,19.268 v1(72.398,21.907) ; v1(86.677,50.457) 86.677,50.505 87.686,51.514 R51.1 87.82,51.482 S4.1 ; v1(94.209,11) v1(94.209,16.05) v1(94.209,21.097)
  Bottom Layer w0.305: S2.1 90.112,41.77 91.911,43.569 91.911,45.092 91.733,45.27 90.394,45.27 89.892,45.772 S4.1
  other v1: 69.793,1.777 71.317,1.777 85.033,1.777 70.555,3.301 84.271,3.301 85.795,3.301 69.793,4.825 71.317,4.825 85.033,4.825 70.555,6.349 84.271,6.349 85.795,6.349 69.793,7.873 71.317,7.873 85.033,7.873 70.555,9.397 84.271,9.397 85.795,9.397 71.317,10.921 72.841,10.921 74.365,10.921 75.889,10.921 77.413,10.921 83.509,10.921 85.033,10.921 70.555,12.445 73.603,12.445 75.127,12.445 76.651,12.445 78.175,12.445 82.747,12.445 84.271,12.445 85.795,12.445 74.365,44.449 75.889,44.449 77.413,44.449 75.127,45.973 75.127,49.021 76.651,49.021 78.175,49.021
GPIO1: P1.2 R41.2 U1.39 | length 58.6
  Top Layer w0.254: U1.39 53.315,37.079 v1(55.527,34.867) ; v1(55.527,16.37) 55.908,16.751 72.553,16.751 72.632,16.673 84.131,16.673 R41.2 87.263,13.54 P1.2
  Bottom Layer w0.254: v1(55.527,16.37) v1(55.527,34.867)
GPIO2: P1.4 R42.2 U1.40 | length 54
  Top Layer w0.254: U1.40 54.836,36.271 55.245,36.271 v1(56.098,35.418) ; v1(56.098,21.374) 72.364,21.374 72.845,20.893 75.154,20.893 76.033,20.015 85.857,20.015 R42.2 88.052,20.847 88.78,20.119 89.491,20.119 P1.4
  Bottom Layer w0.254: v1(56.098,21.374) v1(56.098,35.418)
GPIO3: P1.6 R43.2 U1.41 | length 49.5
  Top Layer w0.254: U1.41 55.136,36.678 55.591,36.678 57.117,35.151 75.609,35.151 76.107,34.653 82.145,34.653 82.643,35.151 86.289,35.151 v1(86.827,34.613) ; v1(86.843,25.309) 86.688,25.154 R43.2 90.476,24.213 P1.6
  Bottom Layer w0.254: v1(86.827,34.613) 86.827,25.324 v1(86.843,25.309)
GPIO4: P1.8 R44.2 U1.42 | length 45.8
  Top Layer w0.254: U1.42 55.401,37.12 55.905,37.12 v1(56.794,36.231) ; v1(56.789,29.296) 56.844,29.242 58.884,29.242 58.947,29.305 59.704,29.305 59.978,29.031 70.592,29.031 70.802,29.242 85.025,29.242 R44.2 89.788,27.579 P1.8
  Bottom Layer w0.254: v1(56.789,29.296) 56.794,29.301 v1(56.794,36.231)
GPIO5: P1.9 U1.43 | length 41.8
  Top Layer w0.254: U1.43 55.644,37.584 56.512,37.584 v1(57.534,36.563) ; v1(57.534,32.527) 57.659,32.402 68.798,32.402 68.998,32.602 88.147,32.602 89.429,31.32 P1.9
  Bottom Layer w0.254: v1(57.534,32.527) v1(57.534,36.563)
GPIO6: P1.10 U1.44 | length 40.7
  Top Layer w0.254: U1.44 55.854,38.081 60.376,38.081 60.47,37.988 v1(60.47,37.899) ; v1(60.437,33.52) P1.10@90.936,33.52
  Bottom Layer w0.254: v1(60.437,33.52) 60.47,33.552 v1(60.47,37.899)
GPIO7: P1.11 U1.45 | length 36.8
  Top Layer w0.254: U1.45 56.155,38.488 60.951,38.488 61.558,37.881 62.161,37.881 62.286,38.006 82.12,38.006 82.267,37.859 89.531,37.859 P1.11
GPIO8: P1.12 U1.46 | length 35.5
  Top Layer w0.254: U1.46 56.455,38.894 61.67,38.894 61.72,38.944 90.985,38.944 P1.12
GPIO9: P1.13 U1.47 | length 37.3
  Top Layer w0.254: U1.47 56.756,39.3 60.912,39.3 61.1,39.488 70.899,39.488 v1(70.933,39.522) ; v1(70.933,41.48) 71.106,41.307 90.816,41.307 P1.13
  Bottom Layer w0.254: v1(70.933,39.522) v1(70.933,41.48)
IA_N: P4.1 XFMR.4 | length 46
  Top Layer w0.381: P4.1 14.897,13.647 17.685,16.436 26.26,16.436 26.446,16.622 26.791,16.967 55.425,16.967 56.378,17.92 XFMR.4
IA_P: P4.2 XFMR.5 | length 46.8
  Top Layer w0.381: P4.2 17.949,15.801 26.523,15.801 26.709,15.987 27.054,16.332 54.723,16.332 55.676,15.38 XFMR.5
IB_N: P3.2 XFMR.2 | length 51
  Top Layer w0.381: P3.2 13.862,19.099 15.949,19.099 17.892,17.156 18.078,16.97 26.039,16.97 26.225,17.156 26.613,17.544 52.278,17.544 52.672,17.938 v1(52.672,18.179) ; v1(53.381,22.611) 54.722,23.952 56.561,23.952 XFMR.2
  Bottom Layer w0.381: v1(52.672,18.179) 52.672,21.902 v1(53.381,22.611)
IB_P: P3.1 XFMR.1 | length 51.3
  Top Layer w0.381: P3.1 14.915,21.031 18.341,17.605 25.776,17.605 26.35,18.179 v1(52.015,18.179) ; v1(52.916,23.076) 54.427,24.587 56.561,24.587 XFMR.1
  Bottom Layer w0.381: v1(52.015,18.179) 52.015,22.175 v1(52.916,23.076)
NetC9_2: C9.2 R22.1 U1.1 | length 7.8
  Top Layer w0.254: v1(47.729,50.353) 48.864,50.353 C9.2 48.542,49.986 U1.1 ; v1(48.034,53.579) 48.052,53.597 R22.1
  Bottom Layer w0.254: v1(47.729,50.353) 47.729,53.274 v1(48.034,53.579)
NetC10_2: C10.2 Q9.3 R25.1 | length 10
  Top Layer w0.254: Q9.3 67.445,42.349 v1(71.031,42.349) ; C10.2 R25.1 70.716,44.206 v1(71.031,44.206)
  Bottom Layer w0.254: v1@71.031,42.311 v1(71.031,42.349) v1(71.031,44.206)
NetC14_2: C14.2 R32.2 R33.1 | length 7.1
  Top Layer w0.254: R33.1@74.796,17.454 74.817,17.433 v1(75.782,17.433) ; C14.2 v1(75.782,19.514) ; R32.2 75.757,15.295 v1(75.782,15.32)
  Bottom Layer w0.254: v1(75.782,15.32) v1(75.782,17.433) v1(75.782,19.514)
NetC15_2: C15.2 R34.2 R35.1 | length 7
  Top Layer w0.254: C15.2@74.846,21.673 C15.2 75.725,21.623 75.75,21.648 v1(75.728,21.67) ; R34.2@74.847,23.733 v1(75.728,23.733) ; R35.1 v1(75.728,25.841)
  Bottom Layer w0.254: v1(75.728,21.67) v1(75.728,23.733) v1(75.728,25.841)
NetD2_1: D2.1 Q1.1 R3.1 | length 75.1
  Top Layer w0.305: Q1.1 27.663,52.482 27.686,52.505 v1(27.686,53.5) ; v1(27.737,54.971) 27.737,55.07 28.943,55.07 28.984,55.11 39.09,55.11 39.612,54.589 40.073,54.589 40.624,55.139 53.904,55.139 54.113,54.93 v1(73.299,54.93) ; v1(78.565,60.195) v1(91.107,60.195)
  Top Layer w1.27: R3.1 26.142,52.469 Q1.1
  Bottom Layer w0.305: v1(27.686,53.5) 27.681,53.505 27.737,53.561 v1(27.737,54.971) ; v1(73.299,54.93) v1(78.565,60.195) ; v1(91.107,60.195) 93.441,60.195 D2.1
NetD2_2: D2.2 R40.2 | length 3.5
  Bottom Layer w0.305: R40.2 92.697,60.986 D2.2
NetD3_1: D3.1 Q2.1 R6.1 | length 78.5
  Top Layer w0.254: Q2.1 28.57,47.294 v1(30.066,48.791) ; v1(30.848,53.685) 30.87,53.707 38.439,53.707 38.801,53.344 40.265,53.344 40.618,52.991 42.194,52.991 42.334,53.132 46.551,53.132 47.628,52.054 51.349,52.054 52.124,52.83 54.628,52.83 54.656,52.858 72.417,52.858 72.499,52.776 73.32,52.776 v1(73.322,52.774)
  Top Layer w0.889: R6.1 26.146,47.294 Q2.1
  Bottom Layer w0.254: v1(30.066,48.791) 30.066,50.002 30.894,50.83 30.848,50.876 v1(30.848,53.685) ; v1(73.322,52.774) 73.619,52.774 79.459,58.613 93.438,58.613 D3.1
NetD3_2: D3.2 R45.2 | length 3.5
  Bottom Layer w0.305: R45.2 92.697,59.408 D3.2
NetD4_1: D4.1 Q3.1 R9.1 | length 130.3
  Top Layer w0.254: v1(27.678,41.095) 27.678,42.094 Q3.1 ; v1(29.571,15.547) 29.583,15.535 v1(51.458,15.535) ; v1(57.907,51.821) 57.926,51.84 71.939,51.84 v1(71.944,51.835)
  Top Layer w0.889: R9.1 26.151,42.12 Q3.1
  Bottom Layer w0.254: v1(27.678,41.095) 28.148,40.625 28.148,35.042 29.571,33.619 v1(29.571,15.547) ; v1(51.458,15.535) 51.483,15.51 51.483,34.282 51.736,34.536 51.736,38.546 51.958,38.546 54.587,41.175 54.587,43.085 55.541,44.038 55.541,49.455 v1(57.907,51.821) ; v1(71.944,51.835) 72.068,51.711 72.867,51.711 72.991,51.835 73.749,51.835 73.79,51.795 79.074,57.079 93.482,57.079 D4.1
NetD4_2: D4.2 R46.2 | length 3.5
  Bottom Layer w0.254: R46.2 92.697,57.829 D4.2
NetD5_1: D5.1 R22.2 S5.3 | length 103
  Top Layer w0.254: R22.2 50.999,54.049 54.123,54.049 54.451,54.377 72.696,54.377 v1(72.702,54.371) ; v1(88.184,17.282) v1(94.897,17.282)
  Bottom Layer w0.254: v1(72.702,54.371) 73.493,54.371 79.015,59.893 81.869,59.893 85.423,63.447 88.316,63.447 88.532,63.231 88.532,62.039 88.801,61.77 93.455,61.77 D5.1 95.054,61.725 95.054,22.891 94.897,22.734 v1(94.897,17.282) ; S5.3 88.184,16.522 v1(88.184,17.282)
NetD5_2: D5.2 R23.1 | length 3.5
  Bottom Layer w0.254: R23.1 89.302,62.547 D5.2
NetD6_1: D6.1 Q4.1 R12.1 | length 132.8
  Top Layer w0.254: v1(25.565,14.722) 25.578,14.735 v1(37.851,14.735) ; v1(26.655,35.57) 27.705,36.62 Q4.1 ; v1(37.816,26.728) 37.836,26.749 v1(72.469,26.749)
  Top Layer w0.889: R12.1 26.156,36.946 Q4.1
  Bottom Layer w0.254: v1(25.565,14.722) 25.565,33.807 26.655,34.897 v1(26.655,35.57) ; v1(37.816,26.728) 37.816,14.77 v1(37.851,14.735) ; v1(72.469,26.749) 73.058,27.338 73.058,50.897 74.042,50.897 78.647,55.503 93.18,55.503 93.91,56.232 D6.1
NetD6_2: D6.2 R48.2 | length 3.5
  Bottom Layer w0.254: R48.2 92.697,56.25 D6.2
NetD7_1: D7.1 Q5.1 R15.1 | length 129.3
  Top Layer w0.254: v1(26.561,30.488) 27.705,31.631 Q5.1 ; v1(26.579,13.399) 26.619,13.358 26.806,13.545 64.103,13.545 v1(64.265,13.383) ; v1(64.257,30.19) 69.672,30.19 70.068,30.587 71.232,30.587 v1(71.557,30.912) ; v1(72.192,39.576) 72.22,39.604 v1(84.684,39.604)
  Top Layer w0.889: R15.1 26.16,31.771 Q5.1
  Bottom Layer w0.254: v1(26.561,30.488) 26.579,30.47 v1(26.579,13.399) ; v1(64.257,30.19) 64.257,13.472 64.168,13.383 v1(64.265,13.383) ; v1(71.557,30.912) 71.547,30.922 71.547,38.931 v1(72.192,39.576) ; v1(84.684,39.604) 84.675,39.604 84.675,41.821 84.605,41.892 84.605,52.898 85.58,53.873 93.434,53.873 D7.1
NetD7_2: D7.2 R49.2 | length 3.5
  Bottom Layer w0.254: R49.2 92.697,54.671 D7.2
NetD8_1: D8.1 Q6.1 R18.1 | length 123.4
  Top Layer w0.254: v1(27.696,13.013) 27.732,12.978 63.415,12.978 v1(63.541,12.852) ; v1(27.696,25.578) 27.696,26.588 Q6.1 ; v1(63.505,34.077) 63.503,34.079 v1(85.829,34.079)
  Top Layer w0.889: R18.1 26.165,26.597 Q6.1
  Bottom Layer w0.254: v1(27.696,13.013) v1(27.696,25.578) ; v1(63.505,34.077) 63.505,12.888 v1(63.541,12.852) ; v1(85.829,34.079) 85.796,34.112 85.796,41.717 85.622,41.891 85.622,42.024 85.441,42.205 85.441,52.037 85.767,52.363 92.231,52.363 92.249,52.345 93.485,52.345 D8.1
NetD8_2: D8.2 R50.2 | length 3.5
  Bottom Layer w0.254: R50.2 92.697,53.093 D8.2
NetD9_1: D9.1 Q7.1 R21.1 | length 118.4
  Top Layer w0.254: Q7.1 27.872,21.255 v1(28.791,21.255) ; v1(29.388,12.367) 29.431,12.324 63.317,12.324 63.32,12.321 64.965,12.321 v1(64.968,12.324) ; v1(64.981,29.563) 69.857,29.563 69.943,29.648 70.068,29.523 70.509,29.523 70.634,29.648 87.408,29.648 v1(87.561,29.494)
  Top Layer w0.889: R21.1 26.17,21.422 Q7.1
  Bottom Layer w0.254: v1(28.791,21.255) 28.791,12.964 v1(29.388,12.367) ; v1(64.968,12.324) 64.981,12.337 v1(64.981,29.563) ; v1(87.561,29.494) 87.61,29.543 87.633,29.543 90.597,32.507 91.189,32.507 92.456,33.774 92.456,36.993 91.636,37.813 91.356,37.813 90.693,38.476 90.693,39.972 90.932,40.211 91.364,40.211 92.743,41.59 92.743,45.22 92.22,45.743 91.117,45.743 90.645,46.215 90.645,47.681 90.833,47.869 91.097,47.869 94.268,51.039 D9.1
NetD9_2: D9.2 R51.2 | length 3.5
  Bottom Layer w0.254: R51.2 92.75,51.514 D9.2
NetP2_10: P2.10 R38.2 | length 2.9
  Top Layer w0.254: R38.2 8.579,48.74 P2.10
NetP2_11: P2.11 R39.2 | length 2.9
  Top Layer w0.254: R39.2 8.568,46.01 P2.11
NetP2_12: P2.12 R37.1 | length 2.9
  Top Layer w0.254: R37.1 8.558,43.281 P2.12
NetP2_13: P2.13 R36.1 | length 2.9
  Top Layer w0.254: R36.1 8.548,40.551 P2.13
NetP5_1: P5.1 P9.2 | length 3.2
  Top Layer w0.254: P9.2@80.701,36.33 P9.2
  Top Layer w2.794: P5.1 P9.2@80.701,36.33
NetQ1_2: Q1.2 R2.1 | length 3.5
  Top Layer w0.254: Q1.2 30.593,50.569 R2.1
NetQ2_2: Q2.2 R5.1 | length 3.4
  Top Layer w0.305: Q2.2 29.538,45.394 29.934,44.999 R5.1
NetQ3_2: Q3.2 R8.1 | length 3.4
  Top Layer w0.305: Q3.2 29.389,40.22 29.791,39.818 R8.1
NetQ4_2: Q4.2 R11.1 | length 3.4
  Top Layer w0.305: Q4.2 30.573,35.046 R11.1
NetQ5_2: Q5.2 R14.1 | length 3.4
  Top Layer w0.305: Q5.2 30.567,29.871 R14.1
NetQ6_2: Q6.2 R17.1 | length 3.5
  Top Layer w0.305: Q6.2 30.56,24.697 R17.1
NetQ7_2: Q7.2 R20.1 | length 3.5
  Top Layer w0.305: Q7.2 28.133,19.094 R20.1
NetR24_2: R24.2 U1.4 U1.6 U1.8 | length 10.1
  Top Layer w0.254: R24.2 45.939,50.35 47.314,48.976 47.314,48.422 46.943,48.051 46.943,47.699 U1.4 48.019,46.623 48.019,46.271 47.665,45.916 47.312,45.916 U1.6 46.045,47.183 45.674,47.183 45.413,46.922 45.413,46.401 U1.8
NetR26_2: R26.2 U1.16 U1.18 U1.20 | length 12.4
  Top Layer w0.305: R26.2 42.517,37.424 U1.20 44.863,39.769 ; U1.16 43.802,42.355 44.14,42.355 44.353,42.568 v1(45.964,42.568) ; U1.18 44.181,40.502 44.467,40.502 44.863,40.107 44.863,39.769 ; v1(45.954,40.871) v1@45.964,40.871 ; v1@45.969,40.876 v1@45.964,40.871 ; 44.863,39.769 v1@45.964,40.871
  Bottom Layer w0.305: v1(45.954,40.871) 45.954,42.578 v1(45.964,42.568)
NetR27_2: R27.2 U1.28 U1.30 | length 8.7
  Top Layer w0.254: U1.28 47.846,37.096 48.434,37.096 48.697,36.833 48.697,36.532 U1.30
  Top Layer w0.305: R27.2 45.683,34.933 U1.28
NetR28_1: R28.1 S1.1 | length 10.3
  Top Layer w0.254: R28.1 v1(86.688,18.454)
  Bottom Layer w0.254: v1(86.688,18.454) 86.688,23.305 S1.1
NetR29_1: R29.1 S3.1 | length 5.4
  Top Layer w0.254: R29.1 v1(87.734,30.945)
  Bottom Layer w0.254: v1(87.734,30.945) 87.75,30.945 88.534,31.729 88.534,33.231 89.436,34.133 S3.1
NetR30_1: R30.1 U1.57 | length 5.3
  Top Layer w0.254: U1.57 54.337,46.415 54.596,46.415 v1(54.94,46.759) ; v1(55.009,49.4) R30.1
  Bottom Layer w0.254: v1(54.94,46.759) 55.009,46.827 v1(55.009,49.4)
NetR30_2: R30.2 R31.1 U1.58 | length 8.4
  Top Layer w0.254: U1.58 54.158,46.943 v1(54.158,46.947) ; v1(54.155,51.755) 54.194,51.794 R30.2 56.49,51.794 R31.1
  Bottom Layer w0.254: v1(54.155,51.755) 54.155,46.949 v1(54.158,46.947)
NetR32_1: R32.1 U1.64 XFMR.6 | length 56.8
  Top Layer w0.254: U1.64 52.22,49.248 54.409,49.248 54.789,48.869 55.229,48.869 55.608,49.248 v1(69.141,49.248) ; v1(69.141,15.38) XFMR.6 71.388,15.295 R32.1
  Bottom Layer w0.254: v1(69.141,15.38) v1(69.141,49.248)
NetR33_2: R33.2 U1.63 XFMR.7 | length 53.1
  Top Layer w0.254: U1.63 52.267,48.588 54.495,48.588 54.62,48.462 55.397,48.462 55.523,48.588 69.713,48.588 v1(69.723,48.598) ; v1(69.784,17.92) XFMR.7 71.819,17.404 R33.2
  Bottom Layer w0.254: v1(69.723,48.598) 69.723,17.981 v1(69.784,17.92)
NetR34_1: R34.1 S1.3 XFMR.9 | length 20.6
  Top Layer w0.254: XFMR.9 72.035,23.732 R34.1 74.393,22.685 77.513,22.685 79.146,21.052 83.703,21.052 84.228,21.576 87.073,21.576 v1(87.457,21.961)
  Bottom Layer w0.254: v1(87.457,21.961) 87.993,21.425 S1.3
NetR35_2: R35.2 S3.3 XFMR.10 | length 21.3
  Top Layer w0.254: XFMR.10 71.605,25.841 R35.2 74.798,27.293 82.132,27.293 82.576,26.849 87.547,26.849 v1(87.584,26.812)
  Bottom Layer w0.254: v1(87.584,26.812) 87.584,28.217 88.42,29.053 S3.3
NetS2_2: S2.2 U1.55 | length 48.8
  Top Layer w0.254: U1.55 56.27,46.934 v1(72.248,46.934) ; v1(72.159,40.358) v1(93.848,40.358)
  Bottom Layer w0.254: v1(72.159,40.358) 72.576,40.776 72.576,46.606 v1(72.248,46.934) ; S2.2 92.812,39.322 v1(93.848,40.358)
NetS4_2: S4.2 U1.52 | length 48.4
  Top Layer w0.254: U1.52 56.801,45.344 v1(57.694,45.344) ; v1(57.704,43.619) v1(71.742,43.619) ; v1(71.742,41.839) 84.78,41.839 85.382,42.441 88.699,42.441 88.78,42.521 93.199,42.521 93.279,42.441 94.249,42.441 v1(94.445,42.636)
  Bottom Layer w0.254: v1(57.694,45.344) 57.704,45.334 v1(57.704,43.619) ; v1(71.742,41.839) v1(71.742,43.619) ; S4.2 94.445,45.237 v1(94.445,42.636)
S1: R20.2 U1.37 | length 40.4
  Top Layer w0.305: R20.2 32.482,19.09 54.678,19.09 v1(54.704,19.116) ; U1.37 52.629,36.378 54.704,34.302 54.656,34.254 v1(54.656,34.232)
  Bottom Layer w0.305: v1(54.656,34.232) 54.656,19.164 v1(54.704,19.116)
S2: R17.2 U1.35 | length 32.2
  Top Layer w0.305: R17.2 32.482,24.247 52.618,24.247 v1(53.033,24.661) ; U1.35 v1(53.033,34.539)
  Bottom Layer w0.305: v1(53.033,24.661) v1(53.033,34.539)
S3: R14.2 U1.33 | length 25.6
  Top Layer w0.305: R14.2 32.482,29.403 52.052,29.403 v1(52.105,29.456) ; U1.33 52.005,34.152 v1(52.105,34.152)
  Bottom Layer w0.305: v1(52.105,29.456) v1(52.105,34.152)
S6: R11.2 U1.25 | length 20.4
  Top Layer w0.305: R11.2 32.482,34.559 37.47,34.559 v1(37.547,34.637) ; v1(37.547,32.32) 44.835,32.32 44.872,32.357 v1(44.872,32.366) ; v1(44.839,35.857) 44.839,36.21 U1.25
  Bottom Layer w0.305: v1(37.547,32.32) v1(37.547,34.637) ; v1(44.839,35.857) 44.872,35.824 v1(44.872,32.366)
S7: R8.2 U1.23 | length 14.3
  Top Layer w0.305: R8.2 32.482,39.715 40.648,39.715 41.587,38.776 v1(41.631,38.819) ; v1(43.858,37.335) 44.023,37.501 44.715,37.501 U1.23
  Bottom Layer w0.305: v1(41.631,38.819) 43.114,37.335 v1(43.858,37.335)
S11: R5.2 U1.13 | length 12.3
  Top Layer w0.305: R5.2 32.482,44.871 43.407,44.871 U1.13
S12: R2.2 U1.11 | length 17
  Top Layer w0.305: R2.2 32.482,50.028 v1(43.142,50.028) ; v1(43.152,46.49) 43.203,46.49 U1.11
  Bottom Layer w0.305: v1(43.142,50.028) 43.142,46.5 v1(43.152,46.49)
SCK: R38.1 S1.2 U1.62 | length 115.4
  Top Layer w0.254: R38.1 4.543,48.74 5.586,49.783 9.877,49.783 10.668,48.992 21.747,48.992 22.489,48.25 v1(28.39,48.25) ; v1(30.724,48.59) 30.78,48.646 v1(46.782,48.646) ; v1(48.953,46.507) 50.894,46.507 U1.62 52.492,48.105 54.402,48.105 54.452,48.056 55.566,48.056 55.615,48.105 69.463,48.105 69.648,47.921 v1(70.288,47.921) ; v1(70.288,30.055) v1(92.808,30.055)
  Bottom Layer w0.254: v1(28.39,48.25) 30.383,48.25 v1(30.724,48.59) ; v1(46.782,48.646) 48.92,46.507 v1(48.953,46.507) ; v1(70.288,30.055) v1(70.288,47.921) ; S1.2 v1(92.808,30.055)
SDI: R36.2 U1.53 | length 62.6
  Top Layer w0.254: R36.2 5.285,41.598 9.18,41.598 10.739,43.157 14.229,43.157 19.832,37.554 25.74,37.554 25.989,37.803 28.509,37.803 28.682,37.63 v1(28.682,35.938) ; v1(31.051,35.966) v1(37.61,35.966) ; v1(37.61,38.501) 37.752,38.644 v1(40.48,38.644) ; v1(54.181,43.431) U1.53
  Bottom Layer w0.254: v1(28.682,35.938) 31.024,35.938 v1(31.051,35.966) ; v1(37.61,35.966) v1(37.61,38.501) ; v1(40.48,38.644) 40.703,38.644 41.41,39.351 41.851,39.351 42.249,38.953 51.79,38.953 54.181,41.344 v1(54.181,43.431)
SDO: R37.2 U1.54 | length 56.7
  Top Layer w0.254: R37.2 5.652,44.694 9.652,44.694 10.813,45.855 17.239,45.855 20.117,42.977 28.23,42.977 28.672,42.535 v1(28.672,41.133) ; v1(32.365,41.128) 42.535,41.128 42.565,41.158 44.816,41.158 v1(44.813,41.161) ; v1(53.233,43.19) 53.233,43.235 54.684,44.686 U1.54
  Bottom Layer w0.254: v1(28.672,41.133) 32.36,41.133 v1(32.365,41.128) ; v1(44.813,41.161) 44.813,42.601 45.402,43.19 v1(53.233,43.19)
VCC: BT1.1 J5.1 P2.9 P6.1 P6.2 P7.1 P7.2 P10.1 P10.2 P11.1 P11.2 Q1.3 R1.1 R24.1 R25.2 R26.1 R27.1 S5.2 | length 164.5
  Top Layer w0.254: Q1.3 29.731,51.519 R1.1 ; P7.2 P7.2@39.842,57.094 ; v1(39.85,37.851) 41.017,36.684 R26.1 v1(39.914,36.665) ; v1(39.85,50.767) 43.997,50.767 R24.1 ; v1(39.908,34.933) R27.1 ; R25.2 v1(72.045,45.161) ; J5.1@86.134,55.502 J5.1@86.162,55.529
  Top Layer w0.305: P7.2@39.827,57.594 P7.2@39.842,57.579 ; v1(42.38,14.31) 60.592,14.31 62.601,16.319 72.374,16.319 72.489,16.205 76.517,16.205 77.526,15.197 v1(84.757,15.197)
  Top Layer w1.27: Q1.3 v2(29.677,53.325)
  Bottom Layer w0.254: v1(39.85,37.851) v1(39.85,50.767) 39.85,55.654 v1(39.873,55.677) ; v1(39.908,34.933) 39.908,36.66 v1(39.914,36.665) ; v1(69.837,55.672) 69.825,55.672 69.825,50.818 71.26,49.383 71.26,47.191 71.716,46.734 71.716,46.714 72.045,46.385 v1(72.045,45.161)
  Bottom Layer w0.305: v1(39.908,34.933) 39.908,34.732 42.38,32.261 v1(42.38,14.31) ; v1(84.757,15.197) 85.681,14.273 S5.2
  Bottom Layer w0.889: P2.9 8.616,55.89 6.365,58.141 6.365,60.957 13.906,68.498 BT1.1@22.384,68.498
  Bottom Layer w1.27: BT1.1@22.384,68.498 27.545,68.498 29.677,66.366 v2(29.677,53.325)
VREF1: C12.2 U1.51 | length 3.6
  Top Layer w0.254: U1.51 56.78,44.615 58.165,44.615 C12.2
VREF2: C13.2 R41.1 R42.1 R43.1 R44.1 U1.50 | length 62.6
  Top Layer w0.254: U1.50 55.326,42.455 55.326,42.052 55.827,41.552 C13.2 58.437,40.365 v1(58.311,40.239) ; v1(58.362,27.315) 74.245,27.315 74.63,27.7 84.096,27.7 v1(84.231,27.564) 85.174,27.564 R44.1 ; v1(84.231,14.115) R41.1 ; v1(84.231,20.828) 85.17,20.828 R42.1 ; v1(84.231,24.199) 84.246,24.213 R43.1
  Bottom Layer w0.254: v1(58.311,40.239) 58.311,27.315 v1(58.362,27.315) ; v1(84.231,14.115) 84.225,14.121 84.225,20.822 v1(84.231,20.828) v1(84.231,24.199) v1(84.231,27.564)
VREG: C11.2 Q9.1 R28.2 R29.2 S2.3 S4.3 U1.48 | length 77.2
  Top Layer w0.254: U1.48 57.057,39.707 60.484,39.707 61.298,40.52 61.298,40.528 ; v1(61.298,40.975) 61.298,40.528 ; v1(61.514,44.186) 61.518,44.182 63.244,44.182 64.223,45.161 C11.2 ; v1(61.94,38.412) 87.884,38.412 v1(87.894,38.402) ; Q9.1 61.298,40.528 ; R29.2 85.415,31.172 86.187,31.943 v1(87.996,31.943)
  Top Layer w0.305: R28.2 v1(85.189,18.506) ; R29.2@85.415,31.172 v1(85.415,31.974)
  Bottom Layer w0.254: v1(61.514,44.186) 61.298,43.97 v1(61.298,40.975) 61.298,39.055 v1(61.94,38.412) ; v1(87.996,31.943) 87.894,32.045 87.894,36.69 ; S2.3 87.894,36.69 ; S4.3 88.274,44.331 87.894,43.95 v1(87.894,38.402) 87.894,36.69
  Bottom Layer w0.305: v1(85.189,18.506) 85.236,18.553 85.236,31.794 v1(85.415,31.974)
WDT: P2.1 U1.56 | length 55.2
  Top Layer w0.254: P2.1 11.456,53.062 22.981,53.062 24.27,54.351 27.21,54.351 27.297,54.438 28.075,54.438 28.162,54.351 28.835,54.351 29.163,54.679 38.911,54.679 39.433,54.157 40.252,54.157 40.556,54.461 53.563,54.461 53.673,54.571 v1(53.673,54.582) ; v1(53.152,44.521) 54.022,45.391 U1.56
  Bottom Layer w0.254: v1(53.152,44.521) 53.673,45.042 53.673,46.68 53.626,46.727 53.626,47.167 53.673,47.214 53.673,51.486 53.624,51.535 53.624,54.533 v1(53.673,54.582)
pads on no net: P2.14 P2.15 P2.16 P2.17 S5.1 S5.P$1 S5.P$2 U1.2 U1.3 U1.5 U1.7 U1.9 U1.14 U1.15 U1.17 U1.19 U1.21 U1.26 U1.27 U1.29 U1.31 XFMR.3 XFMR.8

## Polygon pours and split planes (outlines as drawn)
GND on Top Layer (solid, pour order 16): 95.466,51.074 74.958,51.074 ccw(c74.958,49.817) 73.701,49.817 73.701,43.564 ccw(c74.45,43.564) 74.45,42.814 95.484,42.814
GND on Top Layer (solid, pour order 14): 70.455,0 85.184,0 ccw(c85.184,1.201) 86.385,1.201 86.385,12.38 ccw(c85.272,12.38) 85.272,13.493 70.89,13.491 ccw(c70.89,11.844) 69.243,11.844 69.243,1.212 ccw(c70.455,1.212)
VCC on Top Layer "Top Layer-VCC" (solid, pour order 0): 13.167,71.462 13.167,58.953 ccw(c16.624,58.953) 16.624,55.496 71.914,55.496 cw(c71.914,51.477) 74.756,54.319 76.902,52.173 ccw(c79.555,54.826) 79.555,51.074 95.466,51.074 95.466,59.756 35.131,59.756 cw(c35.131,63.332) 31.554,63.332 31.554,71.376 21.398,71.447
GND on Bottom Layer (solid, pour order 24): 86.385,1.369 86.385,12.489 ccw(c85.344,12.489) 85.344,13.531 84.414,13.531 cw(c84.414,14.204) 83.741,14.204 83.741,49.769 ccw(c82.426,49.769) 82.426,51.084 75.187,51.084 ccw(c75.186,49.578) 73.68,49.578 73.68,43.531 ccw(c74.381,43.53) 74.381,42.829 75.243,42.829 cw(c75.243,41.651) 76.421,41.651 76.417,14.845 cw(c75.103,14.845) 75.103,13.531 70.894,13.531 ccw(c70.894,11.88) 69.243,11.88 69.243,1.369 ccw(c70.612,1.369) 70.612,0 85.016,0 ccw(c85.016,1.369)

## Keep-outs
Keep-Out Layer: